# Altium PCB AB正交解码.PcbDoc
Units mm, origin at the board's own origin, x right, y up, seen from the top; angles counter-clockwise.
Board outline 49.66 x 28.19 mm, 2 copper layers (Top Layer, Bottom Layer); 20 components, 18 nets, 79 pads, 18 vias.
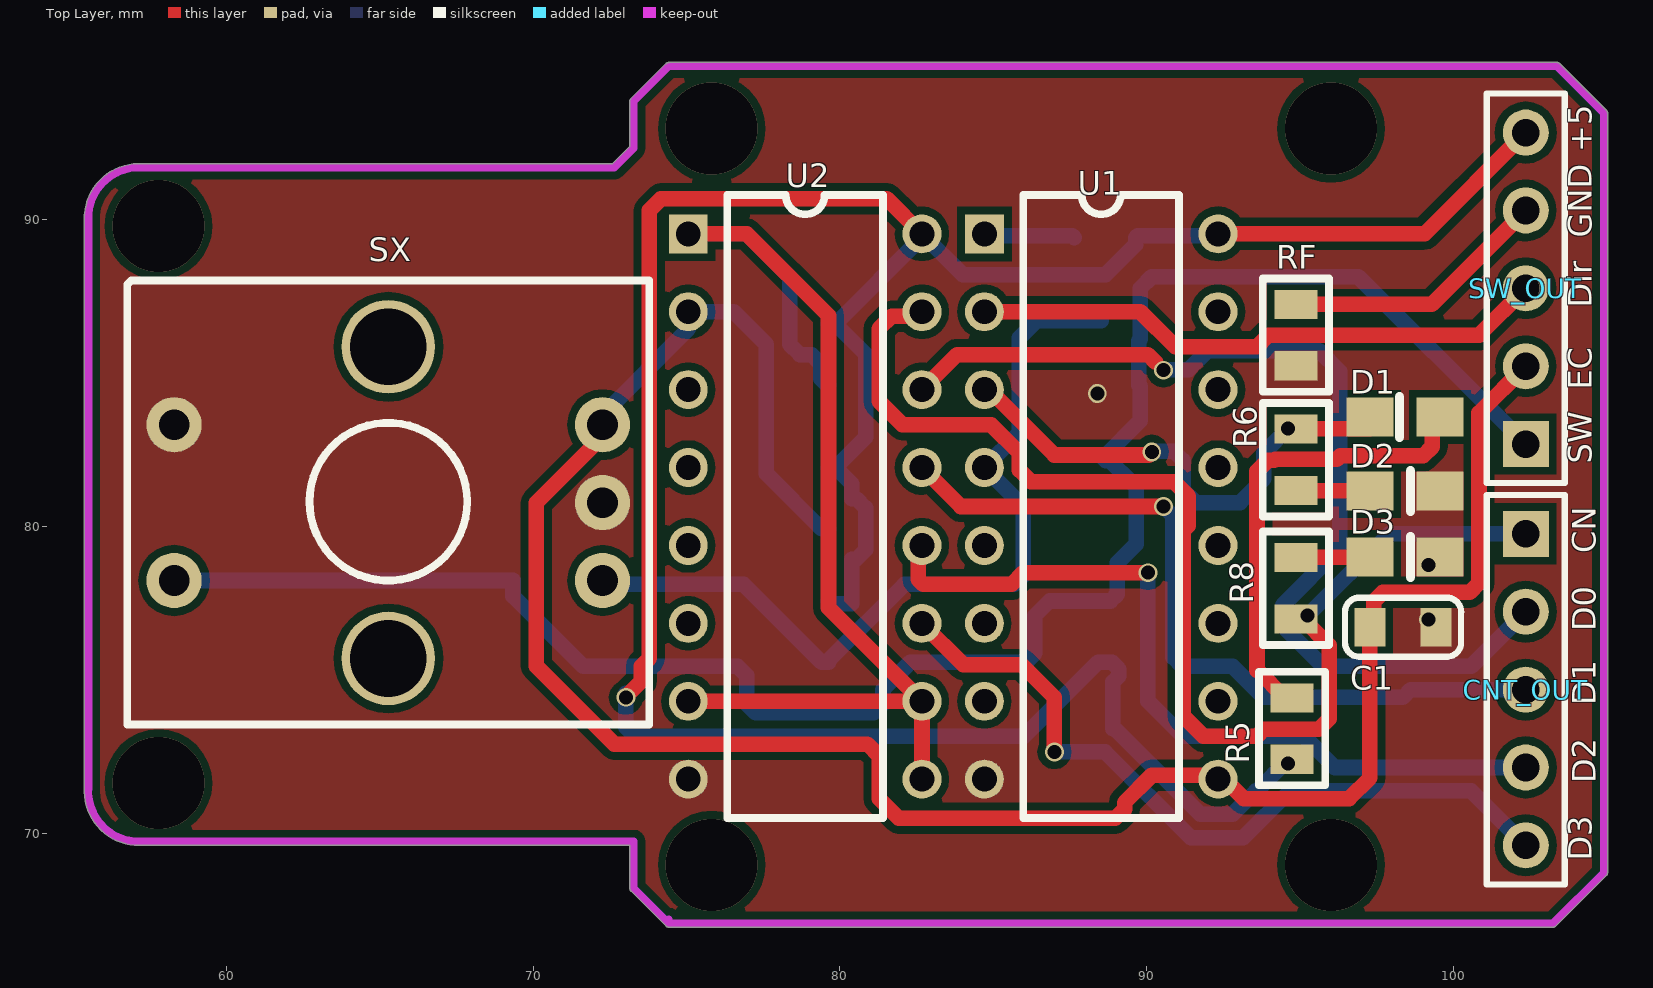
[diagram p0: Top Layer view]
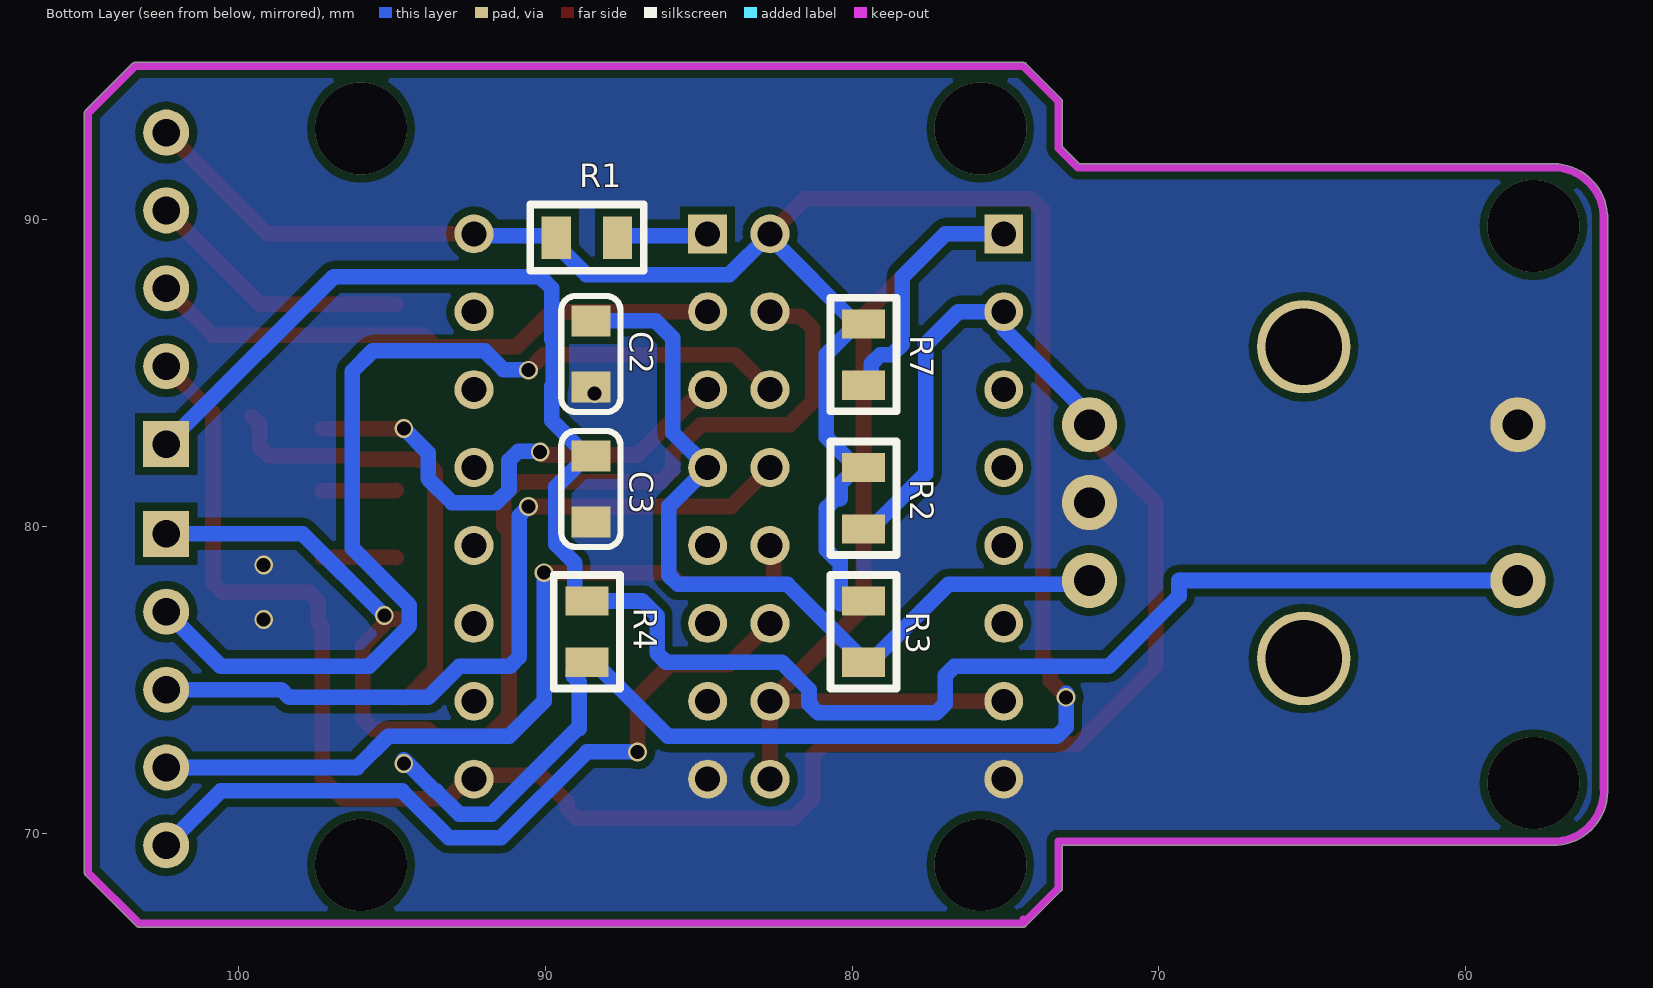
[diagram p1: Bottom Layer view, seen from below]
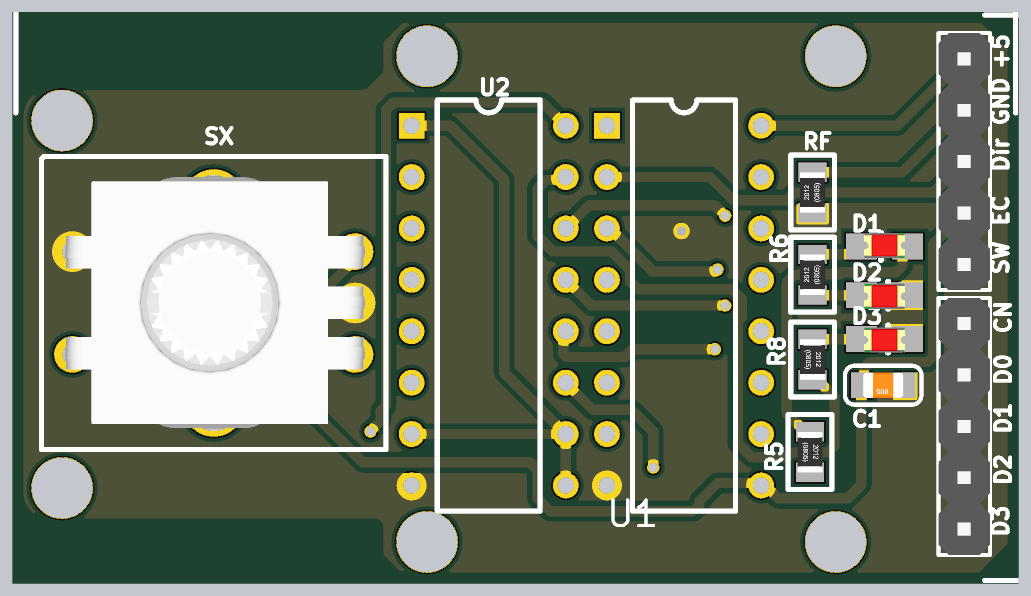
[diagram p2: 3D render of the assembled board from above, using the file's embedded part models]
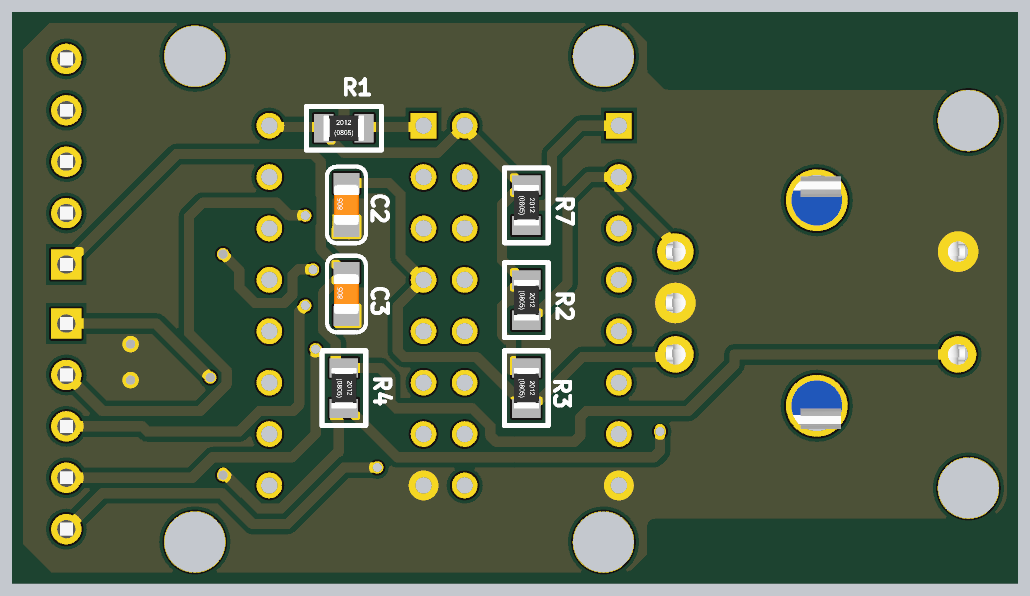
[diagram p3: 3D render of the assembled board from below, using the file's embedded part models]

## Layer stack, top to bottom
Top Solder: solder mask 0.0102, Solder Resist, Dk 3.5
Top Layer: signal copper 0.0356
Dielectric 1: dielectric 0.32, FR-4, Dk 4.8
Bottom Layer: signal copper 0.0356
Bottom Solder: solder mask 0.0102, Solder Resist, Dk 3.5

## Board outline
57.012,69.596 ccw(c57.023,69.723) 57.023,69.596 73.152,69.596 73.152,68.199 ccw(c73.279,68.199) 73.189,68.108 73.189,68.109 74.332,66.966 74.331,66.966 ccw(c74.422,67.056) 74.422,66.929 103.251,66.929 ccw(c103.251,67.056) 103.342,66.966 103.341,66.966 104.992,68.617 104.992,68.616 ccw(c104.902,68.707) 105.029,68.707 105.029,93.472 ccw(c104.902,93.472) 104.992,93.563 104.992,93.562 103.468,95.086 103.469,95.086 ccw(c103.378,94.996) 103.378,95.123 74.422,95.123 ccw(c74.422,94.996) 74.331,95.086 74.332,95.086 73.189,93.943 73.189,93.944 ccw(c73.279,93.853) 73.152,93.853 73.152,92.382 72.591,91.821 57.282,91.821 ccw(c57.15,90.043) 55.372,90.18 ccw(c55.499,90.17) 55.372,90.17 55.372,71.506 ccw(c57.15,71.374)

## Design rules (kind name [scope] priority, off if disabled: settings)
Clearance [All] p1: gap=0.254 ignorepadtopadclearanceinfootprint=FALSE except(0: Arc-Hole Track-Hole SMDPad-Hole THPad-Hole Via-Hole Fill-Hole Poly-Hole Region-Hole Text-Hole)
PolygonConnect [All] p1: connectstyle=Direct reliefconductorwidth=0.254 reliefentries=4 polygonreliefangle="90 Angle" airgapwidth=0.254
RoutingVias [All] p1: holewidth=0.711 width=1.27 viastyle="Through Hole" minholewidth=0.711 minwidth=1.27 maxholewidth=0.711 maxwidth=1.27
SolderMaskExpansion [All] p1: expansion=0.102
Width [All] p1: maxlimit=1.27 minlimit=0.254 preferedwidth=0.508 minimp=50.000000 maximp=50.000000 favimp=50.000000
30 further rules are at their usual default settings.

## Components (designator, comment, footprint, x,y, rotation, side; value= is the part's Value field where it differs from the comment)
C1 "104" 0805C 99.441,76.708 r180 top value=103
C2 "104" 0805C 88.519,84.538 r90 bottom value=103
C3 "104" 0805C 88.519,80.137 r90 bottom value=103
CNT_OUT "Header5" HDR1X5 102.362,79.756 r270 top
D1 "LED2" LED_0805 99.568,83.566 r180 top
D2 "LED2" LED_0805 97.282,81.153 r0 top
D3 "LED2" LED_0805 97.282,78.994 r0 top
R1 "Res2" 0805 88.646,89.408 r180 bottom value=10K
R2 "Res2" 0805 79.629,80.915 r270 bottom value=10K
R3 "Res2" 0805 79.629,76.565 r270 bottom value=10K
R4 "Res2" 0805 88.646,76.565 r270 bottom value=10K
R5 "Res2" 0805 94.742,73.406 r270 top value=2.7K
R6 "Res2" 0805 94.869,82.169 r90 top value=2.7K
R7 "Res2" 0805 79.629,85.598 r270 bottom value=10K
R8 "Res2" 0805 94.869,77.978 r270 top value=2.7K
RF "Res2" 0805 94.869,86.233 r90 top value=0
SW_OUT "Header5" HDR1X5 102.362,82.677 r90 top
SX "XZBMKG" EC11 65.38,80.799 r90 top
U1 "74ls175" DIP16 85.979,70.358 r0 top
U2 "74ls160" DIP16 76.327,70.358 r0 top

## Footprints (in the part's own frame and the unit in brackets; to place one, negate y for a bottom-side part, rotate by r counter-clockwise, add the part's x,y. Pads: shape width x height; smd on the part's side, far side on the other; paste and mask are expansions set on the pad)
0805 [mm] "SMD, 0805"
  rect 0.95x1.4 smd: 1(-1,0) 2(1,0)
  silkscreen extent -1.85,-1.08 1.85,1.08, body extent -1,-0.62 1,0.63, height 0.45
0805C [mil]
  rect 40x50 smd: 1(0,0) 2(85,0)
  silkscreen extent -32,-38 117,38, body extent 3,-25 82,25, height 30
DIP16 [mil] "STC"
  rect 50x50 hole 32: 1(-50,755)
  round 50 hole 32: 2(-50,655) 3(-50,555) 4(-50,455) 5(-50,355) 6(-50,255) 7(-50,155) 8(-50,55) 9(250,55) 10(250,155) 11(250,255) 12(250,355) 13(250,455) 14(250,555) 15(250,655) 16(250,755)
  silkscreen extent 0,5 200,805
EC11 [mm]
  round 1.8 hole 1: 1(2.513,-6.883) 2(-0.027,-6.883) 3(-2.567,-6.883) 4(2.513,7.087) 5(-2.567,7.087)
  round 3.048 hole 2.5: 6(5.053,0.102) 7(-5.107,0.102)
  silkscreen extent -7.27,-8.41 7.21,8.61, body extent -6.25,-7.35 6.22,7.45, height 22
HDR1X5 [mm] "Connector; Header; 5 Position"
  rect 1.5x1.5 hole 0.9: 1(0,0)
  round 1.5 hole 0.9: 2(2.54,0) 3(5.08,0) 4(7.62,0) 5(10.16,0)
  silkscreen extent -1.27,-1.27 11.43,1.27, body extent -1.27,-1.27 11.43,1.27, height 8.54
LED_0805 [mil]
  rect 60x50 smd: 1(0,0) 2(90,0)
  silkscreen extent 52,-26 52,26, body extent 5,-27 85,23, height 43

## Part data
C1 C2 C3: library part Cap, "Capacitor", LatestRevisionDate=17-Jul-2002, LatestRevisionNote="Re-released for DXP Platform.", PackageDescription="Radial Cap, Thru-Hole; 2 Leads; 0.3 in Pin Spacing", PackageReference=RAD-0.3, Published=8-Jun-2000, Publisher="Altium Limited"
D1 D2 D3: "Typical RED, GREEN, YELLOW, AMBER GaAs LED", LatestRevisionDate=17-Jul-2002, LatestRevisionNote="Re-released for DXP Platform.", PackageDescription="SM LED; 2 Flat Leads", PackageReference=3.2X1.6X1.1, PackageVersion=Feb-2002, Published=8-Jun-2000, Publisher="Altium Limited"
R1 R2 R3 R4 R5 R6 R7 R8 RF: "Resistor", LatestRevisionDate=17-Jul-2002, LatestRevisionNote="Re-released for DXP Platform.", PackageDescription="Axial Device, Thru-Hole; 2 Leads; 0.4 in Pin Spacing", PackageReference=AXIAL-0.4, Published=8-Jun-2000, Publisher="Altium Limited"
SX: library part CON5, "Connector"
U1: library part 74ls165

## Via types
v1: diameter 0.61, hole 0.457, Top Layer to Bottom Layer, 12 vias
v2: diameter 3, hole 3, Top Layer to Bottom Layer, 6 vias

## Nets (pads, with @x,y where several pads share a name; then routed paths per layer and width w, separated by ;. In a path a pad name is that pad's centre, name@x,y a point inside that pad or via, vN(x,y) a via of type N, cw(c..) or ccw(c..) an arc to the next point about the centre after c; other vN are vias at no path point)
+5: R1.1 R2.1 R3.1 R4.2 R5.2 R7.1 SW_OUT.5 U1.16 U2.16 | length 92.1
  Top Layer w0.508: v1(73.025,74.422) 73.025,74.449 73.533,74.957 73.533,75.438 73.787,75.692 73.787,90.297 74.168,90.678 81.534,90.678 U2.16 ; U1.16 99.06,89.535 SW_OUT.5
  Bottom Layer w0.508: v1@73.025,74.549 v1(73.025,74.422) 73.025,73.45 73.323,73.152 86.008,73.152 88.421,75.565 R4.2 88.871,75.565 89.092,75.344 89.092,75.119 88.9,74.927 88.9,73.406 88.962,73.406 91.756,70.612 92.802,70.612 93.564,71.374 93.599,71.374 v1@94.615,72.39 ; R3.1 79.724,77.47 80.391,77.47 80.391,78.932 80.539,78.932 80.837,79.23 80.837,80.6 80.539,80.898 80.391,80.898 80.391,81.378 R2.1@79.854,81.915 ; R2.1 R2.1@79.854,81.915 ; R7.1 R7.1@79.854,86.598 ; U1.16 92.266,89.471 89.71,89.471 R1.1 89.646,89.183 88.663,88.2 84.012,88.2 U2.16 82.677,89.421 R7.1@79.854,86.598 ; R2.1@79.854,81.915 80.837,82.898 80.837,85.615 R7.1@79.854,86.598
  other v1: 94.615,72.263
A: C1.2 R2.2 SW_OUT.2 SX.1 U1.9 U2.2 | length 72.1
  Top Layer w0.508: SX.1@72.288,83.666 72.288,82.956 70.104,80.772 70.104,75.438 72.644,72.898 80.899,72.898 81.28,72.517 81.28,71.12 81.915,70.485 88.983,70.485 89.281,70.783 89.281,70.993 90.17,71.882 92.202,71.882 U1.9 92.535,71.755 93.17,71.12 96.603,71.12 97.282,71.799 C1.2 97.409,76.835 97.409,77.553 97.707,77.851 100.54,77.851 100.838,78.149 100.838,83.693 SW_OUT.2
  Bottom Layer w0.508: SX.1@72.288,83.666 75.057,86.435 U2.2 76.537,86.995 77.597,85.935 77.597,81.722 79.404,79.915 R2.2
B: C2.2 R3.2 SX.3 U1.4 | length 27.8
  Bottom Layer w0.508: SX.3@72.288,78.586 72.769,78.105 76.864,78.105 79.404,75.565 R3.2 79.629,75.63 82.104,78.105 85.681,78.105 85.979,78.403 85.979,80.645 U1.4 85.852,83.058 85.852,86.145 86.404,86.697 C2.2
CN: CNT_OUT.1 R8.2 U2.15 | length 40.3
  Top Layer w0.508: U2.15 82.531,86.849 81.686,86.849 81.28,86.443 81.28,84.074 82.042,83.312 84.928,83.312 85.852,82.388 85.852,81.832 86.226,81.458 90.888,81.458 91.364,80.982 91.364,80.026 91.186,79.848 91.186,73.822 91.856,73.152 93.595,73.152 93.832,73.389 95.618,73.389 95.95,73.721 95.95,76.122 95.094,76.978 R8.2
  Bottom Layer w0.508: v1(95.25,77.089) 97.917,79.756 CNT_OUT.1
D0: CNT_OUT.2 U2.14 | length 32.8
  Top Layer w0.508: U2.14 83.82,85.598 90.043,85.598 90.297,85.344
  Bottom Layer w0.508: v1(90.551,85.09) 90.57,85.109 91.367,85.109 91.983,85.725 95.631,85.725 96.295,85.061 96.295,79.283 94.437,77.426 94.437,76.752 95.752,75.438 100.584,75.438 CNT_OUT.2
D1: CNT_OUT.3 U2.13 | length 25.6
  Top Layer w0.508: U2.13 83.947,80.645 v1(90.551,80.645)
  Bottom Layer w0.508: v1(90.551,80.645) 90.856,80.34 90.856,75.736 91.153,75.438 92.802,75.438 93.818,74.422 98.354,74.422 98.608,74.676 CNT_OUT.3
D2: CNT_OUT.4 U2.12 | length 26.3
  Top Layer w0.508: U2.12 82.55,79.248 82.55,78.276 82.721,78.105 85.598,78.105 85.979,78.486 v1(90.043,78.486)
  Bottom Layer w0.508: v1(90.043,78.486) 90.043,74.295 91.186,73.152 95.123,73.152 96.139,72.136 CNT_OUT.4
D3: CNT_OUT.5 U2.11 | length 25
  Top Layer w0.508: U2.11 84.02,75.492 85.925,75.492 86.995,74.422 v1(86.995,72.644)
  Bottom Layer w0.508: v1(86.995,72.644) 88.646,72.644 91.44,69.85 93.153,69.85 94.677,71.374 100.584,71.374 CNT_OUT.5
DGND: C1.1 C2.1 C3.1 D2.2 D3.2 RF.1 SX.2 SX.4 U1.8 U2.8
  other v1: 99.187,76.962 99.187,78.74 88.392,84.328
Dir: SW_OUT.3 U1.2 | length 18.9
  Top Layer w0.508: U1.2 89.795,86.995 90.938,85.852 93.595,85.852 93.976,86.233 100.838,86.233 SW_OUT.3
NetD1_1: D1.1 R5.1 | length 15.1
  Top Layer w0.508: R5.1 94.517,74.406 93.612,75.311 93.599,75.311 93.599,81.792 93.959,82.152 94.158,82.152 94.192,82.186 96.2,82.186 96.31,82.296 99.016,82.296 99.314,82.594 99.314,83.312 D1.1
NetD1_2: D1.2 R6.2 U1.3 | length 15.9
  Top Layer w0.508: U1.3@84.863,84.455 86.995,82.323 90.07,82.323 v1(90.17,82.423) ; R6.2 94.877,83.177 97.274,83.177 D1.2@97.282,83.185
  Bottom Layer w0.508: v1(90.17,82.423) 90.189,82.442 90.888,82.442 91.186,82.145 91.186,81.188 91.602,80.772 93.047,80.772 93.821,81.546 93.821,82.391 v1(94.615,83.185)
NetD2_1: D2.1 R6.1 | length 2.4
  Top Layer w0.508: R6.1 94.877,81.161 97.274,81.161 D2.1
NetD3_1: D3.1 R8.1 | length 2.4
  Top Layer w0.508: R8.1 94.877,78.986 97.274,78.986 D3.1
NetR1_2: R1.2 U1.1 | length 3
  Bottom Layer w0.508: U1.1 84.772,89.471 87.582,89.471 R1.2
NetR7_2: R7.2 U2.1 U2.7 U2.9 U2.10 | length 37.9
  Top Layer w0.508: U2.7 U2.10 ; U2.1 76.962,89.535 79.629,86.868 79.629,77.343 U2.10 ; U2.9 U2.10
  Bottom Layer w0.508: U2.1 76.962,89.535 78.359,88.138 78.359,85.935 78.696,85.598 79.077,85.598 79.375,85.3 79.375,84.819 79.596,84.598 R7.2
NetRF_2: RF.2 SW_OUT.4 | length 8.8
  Top Layer w0.508: RF.2 99.298,87.233 SW_OUT.4
SW: C3.2 R4.1 SW_OUT.1 SX.5 | length 61.9
  Bottom Layer w0.508: SX.5@58.318,78.586 58.672,78.232 69.342,78.232 69.342,77.724 71.628,75.438 76.664,75.438 76.962,75.14 76.962,74.212 77.26,73.914 81.109,73.914 81.407,74.212 81.407,74.676 82.296,75.565 86.062,75.565 86.36,75.863 86.36,77.089 86.836,77.565 R4.1 88.824,77.565 89.045,77.786 89.045,78.802 89.662,79.419 89.662,81.28 C3.2@88.646,82.296 ; C3.2@88.677,82.138 C3.2 C3.2@88.646,82.296 ; SW_OUT.1@101.854,83.185 96.901,88.138 90.17,88.138 89.789,87.757 89.789,86.106 89.738,86.055 89.738,84.607 89.789,84.556 89.789,83.439 C3.2@88.646,82.296
pads on no net: SX.6 SX.7 U1.5 U1.6 U1.7 U1.10 U1.11 U1.12 U1.13 U1.14 U1.15 U2.3 U2.4 U2.5 U2.6
copper on no net:
  other v2: 75.819,68.961 96.012,68.961 57.785,71.628 57.785,89.789 75.819,92.964 96.012,92.964

## Polygon pours and split planes (outlines as drawn)
DGND on Top Layer "Top Layer-DGND" (solid, remove dead copper, pour order 24): 52.451,98.679 107.696,98.679 108.458,97.917 108.458,64.008 52.07,64.008 50.8,65.278
DGND on Bottom Layer "Bottom Layer-DGND" (solid, remove dead copper, pour order 26): 50.546,99.441 51.181,100.076 109.093,100.076 109.093,65.659 107.95,64.516 107.315,65.151 48.641,65.151

## Keep-outs
Keep-Out Layer:
  lines w0.254: 74.422,67.183 74.422,67.056 ; 74.422,67.056 73.279,68.199 73.279,69.723 57.023,69.723 cw(c57.15,71.374) 55.499,71.501 55.499,90.17 cw(c57.15,90.043) 57.277,91.694 72.644,91.694 73.279,92.329 73.279,93.853 74.422,94.996 103.378,94.996 104.902,93.472 104.902,68.707 103.251,67.056 75.311,67.056 74.422,67.056

## Silkscreen, mask and mechanical layers (free items; w line width, h text height)
Top Overlay:
  text "+5" at 104.521,92.202 h0.76 r90
  text "GND" at 104.521,89.408 h0.76 r90
  text "Dir" at 104.521,87.122 h0.76 r90
  text "EC" at 104.521,84.455 h0.76 r90
  text "SW" at 104.521,82.042 h0.76 r90
  text "CN" at 104.648,79.121 h0.76 r90
  text "D0" at 104.648,76.581 h0.76 r90
  text "D1" at 104.648,74.168 h0.76 r90
  text "D2" at 104.648,71.628 h0.76 r90
  text "D3" at 104.521,69.088 h0.76 r90

## Dimensions
103.378,94.996 to 103.251,67.056 on Top Overlay
55.499,90.17 to 104.902,93.472 on Top Overlay